# Altium PCB PCB2.PcbDoc
Units mil, origin at the board's own origin, x right, y up, seen from the top; angles counter-clockwise.
Board outline 1675 x 700 mil, 2 copper layers (Top Layer, Bottom Layer); 14 components, 14 nets, 50 pads, 14 vias.
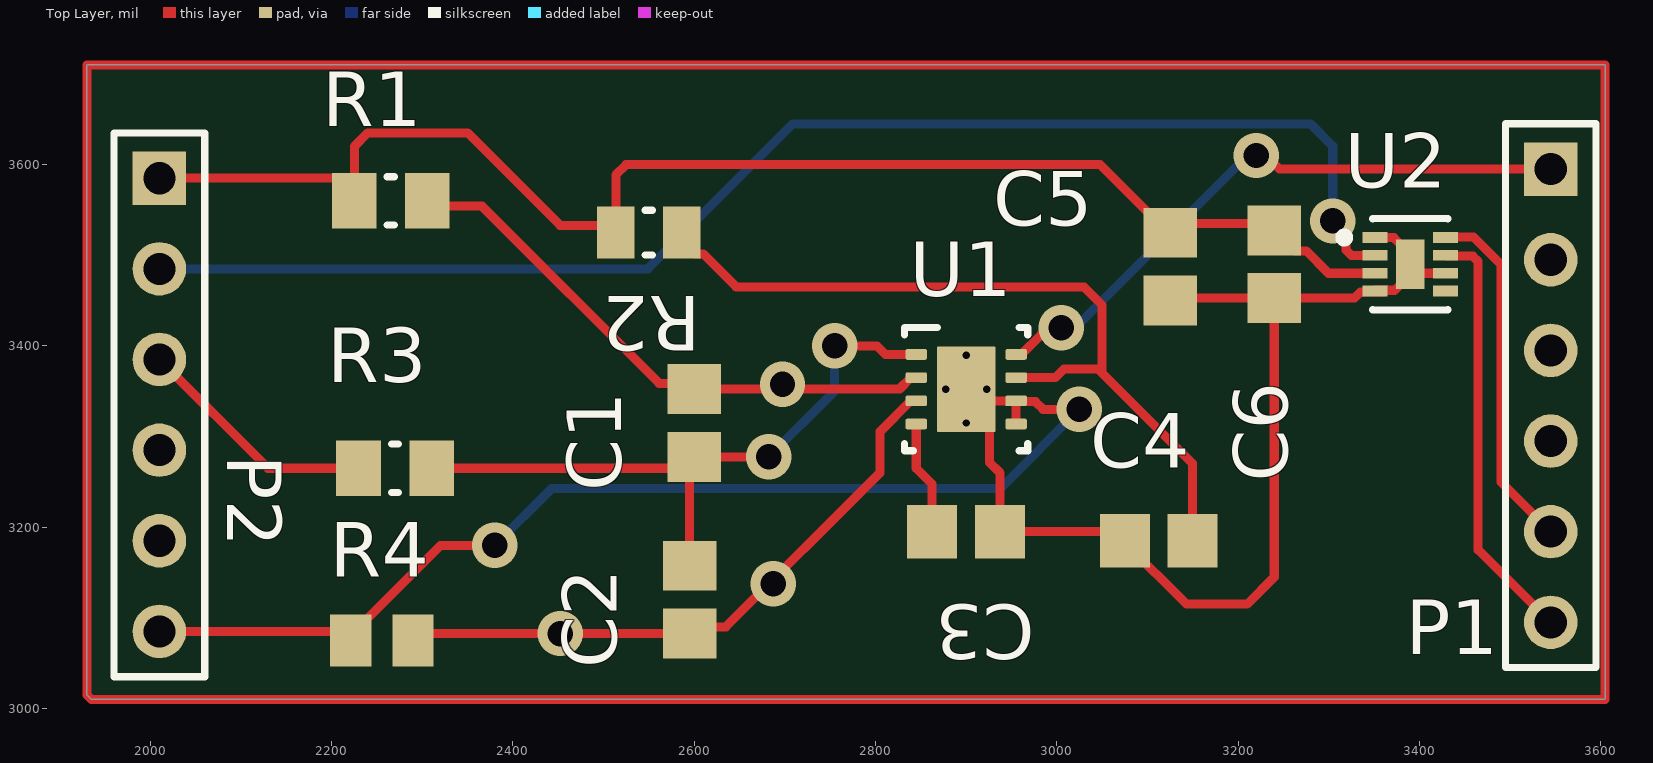
[diagram p0: Top Layer view]
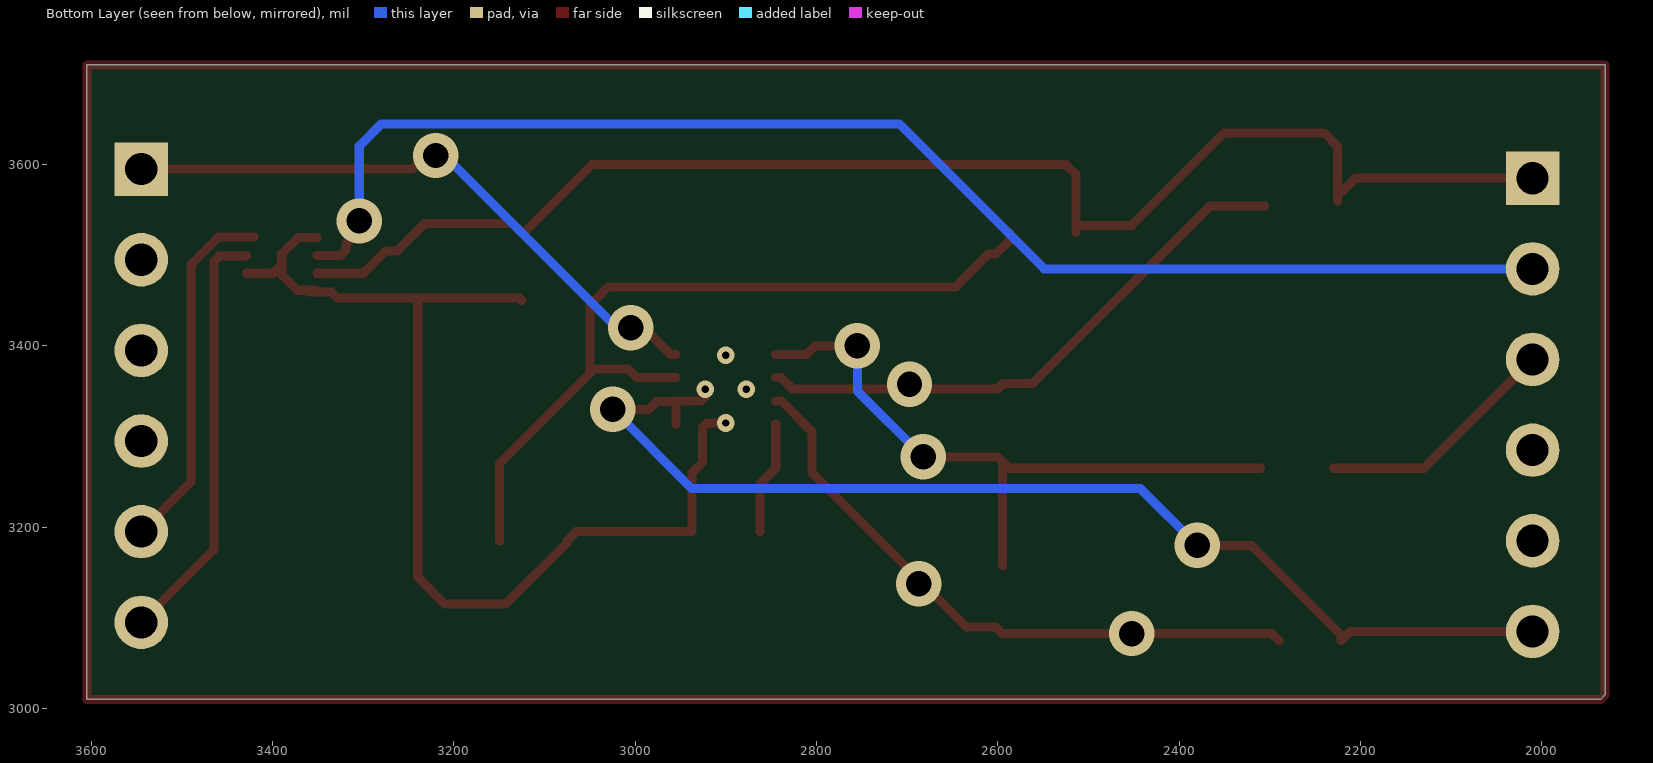
[diagram p1: Bottom Layer view, seen from below]

## Layer stack, top to bottom
Top Solder: solder mask 0.4, Solder Resist, Dk 3.5
Top Layer: signal copper 1.4
Dielectric 1: dielectric 12.6, FR-4, Dk 4.8
Bottom Layer: signal copper 1.4
Bottom Solder: solder mask 0.4, Solder Resist, Dk 3.5

## Board outline
1935,3010 1930,3015 1930,3710 3605,3710 3605,3010

## Design rules (kind name [scope] priority, off if disabled: settings)
Clearance [All] p1: gap=10 ignorepadtopadclearanceinfootprint=FALSE except(0: SMDPad-Hole THPad-Hole Via-Hole Fill-Hole Poly-Hole Region-Hole Text-Hole; 5: Arc-Arc Arc-Track Arc-SMDPad Arc-THPad Arc-Via Arc-Fill Arc-Poly Arc-Region Arc-Text Arc-Hole Track-Track Track-SMDPad Track-THPad Track-Via Track-Fill Track-Poly Track-Region Track-Text Track-Hole)
PolygonConnect [All] p1: connectstyle=Relief reliefconductorwidth=10 reliefentries=4 polygonreliefangle="90 Angle" airgapwidth=10
RoomDefinition Sheet1 [InComponentClass('Sheet1')] p1: confinementstyle=ConfineIn formatcopy=TRUE lockcomponents=FALSE outline 0,0 2000,0 2000,1000 0,1000
RoutingVias [All] p1: holewidth=28 width=50 viastyle="Through Hole" minholewidth=28 minwidth=50 maxholewidth=28 maxwidth=50
SolderMaskExpansion [All] p1: expansion=4 istentingtop=FALSE
Width [All] p1: maxlimit=10 minlimit=10 preferedwidth=10
30 further rules are at their usual default settings.

## Components (designator, comment, footprint, x,y, rotation, side; value= is the part's Value field where it differs from the comment)
C1 "GRM21BR71H104KA01L" CAPC2013X135X45ML10T25 2600,3315 r90 top
C2 "GRM21BR71H104KA01L" CAPC2013X135X45ML10T25 2595,3120 r90 top
C3 "GRM21BR71H104KA01L" CAPC2013X135X45ML10T25 2900,3195 r180 top
C4 "GRM21BR71H104KA01L" CAPC2013X135X45ML10T25 3112.6,3185 r0 top
C5 "GRM21BR71H104KA01L" CAPC2013X135X45ML10T25 3125,3487.4 r270 top
C6 "GRM21BR71H104KA01L" CAPC2013X135X45ML10T25 3240,3490 r90 top
P1 "Header 6" HDR1X6 3545,3595 r270 top
P2 "Header 6" HDR1X6 2010,3585 r270 top
R1 "CRCW0805200RJNEA" RESC2013X50X30ML20T20 2265.35,3560 r0 top
R2 "CRCW0805100RFKEA" RESC2013X50X30NL20T20 2550,3525 r180 top
R3 "CRCW0805200RJNEA" RESC2013X50X30ML20T20 2270,3265 r0 top
R4 "ERJ-6ENF1200V" RESC2013X70X40NL20T20 2255.55,3075 r0 top
U1 "BQ29209DRBR" DRB0008B_V 2900.12,3352.2 r0 top
U2 "MAX17049G+T10" FP-T822-3-MFG 3390,3490 r0 top

## Footprints (in the part's own frame and the unit in brackets; to place one, negate y for a bottom-side part, rotate by r counter-clockwise, add the part's x,y. Pads: shape width x height; smd on the part's side, far side on the other; paste and mask are expansions set on the pad)
CAPC2013X135X45ML10T25 [mm] "Chip Capacitor, 2-Leads, Body 2.10x1.35mm, IPC Low Density"
  rect 1.4x1.5 smd: 1(-0.95,0) 2(0.95,0)
  body extent -1.05,-0.67 1.05,0.67, height 1.35
DRB0008B_V [mm] "SON, 8-Leads, Body 3x3mm, Pitch 0.65mm, Thermal Pad 2.4x1.65mm, TI Recommended"
  rrect33% 0.6x0.3 smd: 1(-1.4,0.975) 2(-1.4,0.325) 3(-1.4,-0.325) 4(-1.4,-0.975) 5(1.4,-0.975) 6(1.4,-0.325) 7(1.4,0.325) 8(1.4,0.975)
  rrect6% 1.65x2.4 smd paste-1.2: 9(0,0)
  silkscreen extent -1.73,-1.73 1.73,1.73, body extent -1.5,-1.5 1.5,1.5, height 0.96
FP-T822-3-MFG [mm]
  rect 0.7x0.3 smd paste+0 mask+0: 1(-0.99,0.75) 2(-0.99,0.25) 3(-0.99,-0.25) 4(-0.99,-0.75) 5(0.99,-0.75) 6(0.99,-0.25) 7(0.99,0.25) 8(0.99,0.75)
  rect 0.8x1.38 smd paste+0 mask+0: 9(0,0)
  silkscreen extent -1.97,-1.28 1.05,1.28, body extent -1.44,-1.15 1.44,1.15, height 0.25
HDR1X6 [mm] "Connector; Header; 6 Position"
  rect 1.5x1.5 hole 0.9: 1(0,0)
  round 1.5 hole 0.9: 2(2.54,0) 3(5.08,0) 4(7.62,0) 5(10.16,0) 6(12.7,0)
  silkscreen extent -1.27,-1.27 13.97,1.27
RESC2013X50X30ML20T20 [mm] "Chip Resistor, 2-Leads, Body 2.00x1.25mm, IPC Low Density"
  rect 1.25x1.55 smd: 1(-1.025,0) 2(1.025,0)
  silkscreen extent -0.1,-0.67 0.1,0.67, body extent -1.1,-0.72 1.1,0.72, height 0.5
RESC2013X50X30NL20T20 [mm] "Chip Resistor, 2-Leads, Body 2.00x1.25mm, IPC Medium Density"
  rect 1.05x1.45 smd: 1(-0.925,0) 2(0.925,0)
  silkscreen extent -0.1,-0.63 0.1,0.63, body extent -1.1,-0.72 1.1,0.72, height 0.5
RESC2013X70X40NL20T20 [mm] "Chip Resistor, 2-Leads, Body 2.2x1.35mm, IPC Medium Density"
  rect 1.15x1.45 smd: 1(-0.875,0) 2(0.875,0)
  body extent -1.1,-0.72 1.1,0.72, height 0.7

## Part data
C1 C2 C3 C4 C5 C6: library part CMP-2100-03644-1, "Chip Capacitor, 0.1 uF, +/- 10%, 50 V, -55 to 125 degC, 0805 (2012 Metric), RoHS, Tape and Reel", Capacitance=100nF, Case Code (Imperial)=0805, Case Code (Metric)=2012, Dielectric=X7R, Dielectric Material=Ceramic, Insulation Resistance=10GR, Manufacturer=Murata, Max Operating Temperature=125degC, Min Operating Temperature=-55degC, Package Description="2-Pin Surface Mount Device, Body 2 x 1.25 mm", Package Quantity=1, Tolerance=10%, Voltage=50V, Case/Package=0805, Datasheet URL=http://psearch.en.murata.com/capacitor/product/GRM21BR71H104KA01%23.pdf, Datasheet Version=42675.0, Depth=1.25mm, Height=1.25mm, Lead Free=LeadFree, Length=2mm, Manufacturer URL=http://www.murata.com/, Material=Ceramic, Mount=SurfaceMount, Number of Pins=2, Package Reference=0805, Packaging=TapeandReel, Radiation Hardening=No, REACH SVHC=Unknown, RoHSCompliant=true, Termination=SMD/SMT, Thickness=0.053inch, Voltage Rating=50V, Voltage Rating (DC)=50V, Width=0.049inch
P1 P2: "Header, 6-Pin", LatestRevisionDate=17-Jul-2002, LatestRevisionNote="Re-released for DXP Platform.", Publisher="Altium Limited"
R1 R3: library part CMP-2001-03664-1, Manufacturer="Vishay Dale", Part Number=CRCW0805200RJNEA, r=200
R2: library part CMP-2001-04901-1, Manufacturer="Vishay Dale", Part Number=CRCW0805100RFKEA, r=100
R4: library part CMP-2001-00511-5, "Chip Resistor, 120 Ohm, +/- 1%, 0.125 W, -55 to 155 degC, 0805 (2012 Metric), RoHS, Tape and Reel", Manufacturer=Panasonic, Max Operating Temperature="155 degC", Min Operating Temperature="-55 degC", Package Quantity=5000, Voltage Rating="150 V", ComponentLink1Description="Manufacturer URL", ComponentLink1URL=http://www.panasonic.com/, ComponentLink2Description=Datasheet, ComponentLink2URL=http://industrial.panasonic.com/cdbs/www-data/pdf/RDA0000/AOA0000C86.pdf, ComponentLink3Description="New link", DatasheetVersion=04/2015, Height="0.6 mm", Length="2 mm", Mount="Surface Mount", Mounting Technology="Surface Mount", PackageDescription="2-Pin Surface Mount Device, Body 2 x 1.25 mm", PackageReference=0805, Packaging="Tape and Reel", Pins=2, r=120, REACH SVHC=Yes, RoHSCompliant=true
U1: library part CMP-0321-00626-2, "Voltage Protection with Automatic Cell Balance for 2-Cell Li-Ion Batteries, OVP=4.3 V, -40 to 85 degC, 8-pin SON (DRB), Green (RoHS & no Sb/Br)", Manufacturer="Texas Instruments", Over Voltage Protection=N, ComponentLink1Description=Datasheet, ComponentLink1URL=http://www.ti.com/general/docs/lit/getliterature.tsp?genericPartNumber=BQ29209&fileType=pdf, DatasheetVersion=SLUSA52A, Eco-Plan="Green (RoHS & no Sb/Br)", Lead Acid=N, Li-Ion=N, Li-Polymer=N, Mounting Technology="Surface Mount", NiCd=N, NiMH=N, PackageDescription="8-Pin Plastic Small Outline No-Lead, 3 x 3 x 1 mm Body, 0.65 mm Pitch, Exposed Pad", PackageReference=DRB0008B, PackageVersion="revK, Jun-2012", PartNumber=BQ29209DRBR, SubFamily="Lithium Ion Protection"
U2: library part CMP-05715-000114-1, "IC FUEL GAUGE LI-ION 2CELL 8TDFN", Manufacturer="Maxim Integrated", Max Supply Voltage=4.5V, Min Supply Voltage=2.5V, Nominal Supply Current=23uA, Package=T822-3, Temperature="-40°C to +85°C", Temperature Range High=+85°C, Temperature Range Low=-40°C, Automotive=No, Category=IC, ComponentLink2Description=Datasheet, ComponentLink2URL=https://datasheets.maximintegrated.com/en/ds/MAX17048-MAX17049.pdf, Device Class L1="Integrated Circuits (ICs)", Device Class L2="Power Management ICs", Device Class L3="Battery Management", Digikey Description="IC FUEL GAUGE LI-ION 2CELL 8TDFN", Footprint Url=https://pdfserv.maximintegrated.com/land_patterns/90-0065.PDF, Height=0.8mm, Lead Free=Yes, Manufacturer Part Number=MAX17049G+T10, Mouser Description="Fuel Gauge Li-Ion 8-Pin TDFN EP T/R", Number of Cells=2, Octopart=https://octopart.com/max17049g%2Bt10-maxim+integrated-20327626, RoHS=TRUE, Standoff Height=0mm

## Via types
v1: diameter 50, hole 28, Top Layer to Bottom Layer, 10 vias
v2: diameter 19.68, hole 7.87, Top Layer to Bottom Layer, 4 vias

## Nets (pads, with @x,y where several pads share a name; then routed paths per layer and width w, separated by ;. In a path a pad name is that pad's centre, name@x,y a point inside that pad or via, vN(x,y) a via of type N, cw(c..) or ccw(c..) an arc to the next point about the centre after c; other vN are vias at no path point)
MONITOR+: P2.2 U2.2 | length 1526
  Top Layer w10: v1(3304.53,3537.87) 3304.53,3527.04 3319.25,3512.32 3319.25,3505.75 3325.16,3499.84 U2.2
  Bottom Layer w10: P2.2 2548.89,3485 2708.89,3645 3280,3645 3304.53,3620.47 v1(3304.53,3537.87)
MONITOR-: P2.5
MONITOR_MID: P2.4
NetC1_1: C1.1 C2.2 R3.2 U1.1 | length 738.8
  Top Layer w10: R3.2 2587.4,3265 C1.1@2595,3272.6 ; C2.2 C1.1@2595,3272.6 ; v1(2682.4,3277.6) C1.1 C1.1@2595,3272.6 ; v1(2755,3400) 2801.58,3400 2810.99,3390.59 U1.1
  Bottom Layer w10: v1(2682.4,3277.6) 2755,3350.2 v1(2755,3400)
NetC1_2: C1.2 R1.2 U1.2 | length 628.1
  Top Layer w10: R1.2@2305.71,3554.09 2365.91,3554.09 2561.33,3358.67 2593.73,3358.67 C1.2 2697.4,3352.4 2826.5,3352.4 2839.09,3365 U1.2
  other v1: 2697.4,3357.6
NetC2_1: C2.1 R4.2 U1.3 | length 691.1
  Top Layer w10: R4.2 2297.6,3082.6 v1(2452.4,3082.6) C2.1 2602.4,3090 2635,3090 2805,3260 2805,3305.32 2839.09,3339.41 U1.3
  other v1: 2687.4,3137.6
NetC3_2: C3.2 U1.4 | length 126.1
  Top Layer w10: U1.4 2845,3265 2862.6,3247.4 C3.2
OUT: P1.1 U1.8 | length 697.5
  Top Layer w10: U1.8 2961.14,3390.59 2982.9,3412.35 2997.35,3412.35 v1(3005,3420) ; v1(3220,3610) 3230.82,3610 3245.82,3595 P1.1
  Bottom Layer w10: v1@3005,3405 v1(3005,3420) ; v1@3012.5,3412.5 3210,3610 v1(3220,3610)
PACK+: C5.1 C6.2 P2.1 R1.1 R2.2 U2.3 | length 1584.1
  Top Layer w10: P2.1 2205.39,3585 R1.1@2225,3565.39 ; R1.1 R1.1@2225,3565.39 ; R2.2 R2.2@2513.58,3532.87 ; U2.3 3299.84,3480.16 3275.16,3504.84 3262.56,3504.84 3232.4,3535 3135.2,3535 C5.1 3123.03,3524.8 3047.83,3600 2525,3600 2513.58,3588.58 R2.2@2513.58,3532.87 ; R1.1@2225,3565.39 2225,3620 2240,3635 2350,3635 2452.13,3532.87 R2.2@2513.58,3532.87
PACK-: C3.1 C4.1 C5.2 C6.1 P2.6 R4.1 U1.5 U1.6 U1.9 U2.1 U2.4 U2.6 U2.9 | length 2481.9
  Top Layer w10: P2.6 2211.1,3085 R4.1 2221.1,3080.91 2320.2,3180 v1(2380,3180) ; v2(2900.12,3314.8) 2920.81,3314.8 2925.65,3309.96 2925.65,3271.59 2937.4,3259.84 C3.1 3065.2,3195 C4.1 3075.2,3183.03 3143.23,3115 3210,3115 3240,3145 C6.1 ; v2(2922.76,3352.2) 2922.76,3344.25 2927.6,3339.41 U1.6 ; U1.5 U1.6 ; v1@3035,3330 v1(3025,3330) 2985,3330 2976.5,3338.5 2956.14,3338.5 U1.6 ; C5.2 3127.6,3452.6 C6.1 ; U2.4 3351.93,3461.38 3372.8,3461.38 3390,3478.58 U2.9 ; U2.1 3371.89,3519.53 3390,3501.42 U2.9 ; U2.4@3360,3459.25 3335,3459.25 3328.35,3452.6 C6.1 ; U2.6 3399.84,3480.16 U2.9
  Bottom Layer w10: v1(2380,3180) 2442.6,3242.6 2937.6,3242.6 v1(3025,3330)
  other v2: 2877.48,3352.2 2900.12,3389.61
PACK_MID: P2.3 R3.1 | length 269.4
  Top Layer w10: P2.3 2130,3265 R3.1
SCL: P1.6 U2.7 | length 475.9
  Top Layer w10: U2.7 3429.88,3498.94 3459.14,3498.94 3465,3493.08 3465,3175 3535,3105 3535,3095 P1.6
SDA: P1.5 U2.8 | length 399.5
  Top Layer w10: U2.8@3420.71,3520 3460,3520 3490,3490 3490,3250 P1.5
VDD: C4.2 R2.1 U1.7 | length 903.5
  Top Layer w10: R2.1 2586.42,3517.13 2602.09,3501.46 2609.96,3501.46 2646.42,3465 3030,3465 3050,3445 3050,3370 ; U1.7 2998.39,3365 3008.07,3374.69 3045.31,3374.69 3050,3370 ; C4.2 3150,3270 3050,3370
pads on no net: P1.2 P1.3 P1.4 U2.5
copper on no net: | length 4747.1
  Top Layer w10: 1930,3015 1930,3710 1960,3710 3605,3710 3605,3010 1935,3010 1930,3015